# EAGLE board Pixelkit_v10LUT (EAGLE 5.08)
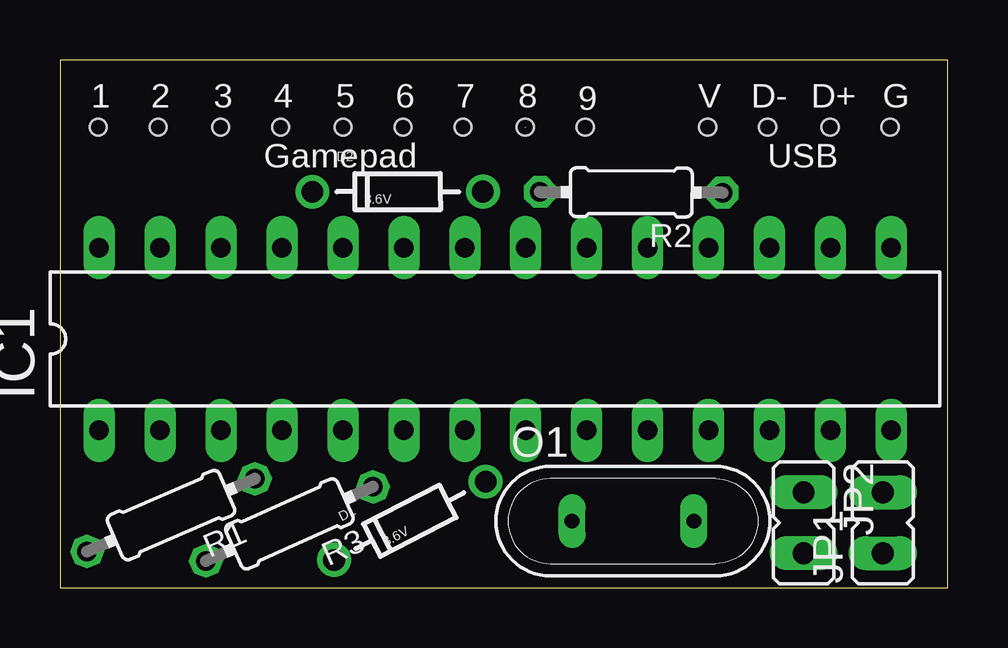
[diagram p0: board, top side]
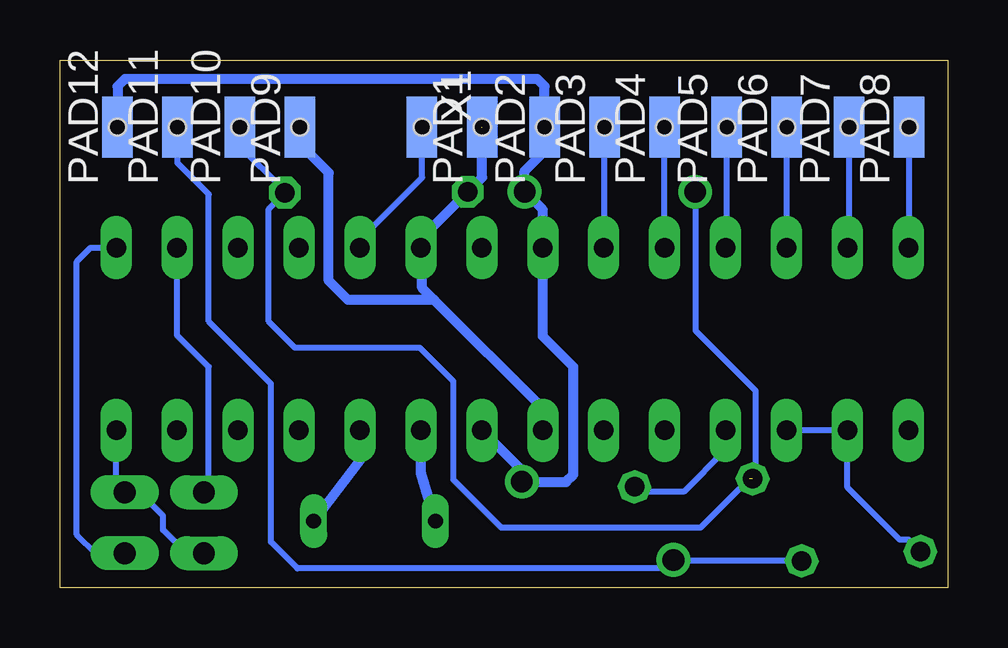
[diagram p1: board, bottom side, seen from below]

Size 37 x 22 mm. Coordinates in mm from the lower left corner, seen from the top.
Outline: 0,0 37,0 37,22 0,22 0,0
Copper layers (1*16): Top 0.035mm / dielectric 1.5mm / Bottom 0.035mm
Design rules "default": minimum track width 10mil, minimum drill 24mil, track to track 8mil, track to pad 8mil, pad to pad 8mil, via to via 8mil, smd to smd 8mil, copper to edge 40mil, drill to drill 8mil, minimum pad ring 10mil, minimum via ring 8mil, stop-mask expansion 4mil, vias tented up to drill 0mil, thermal gap 10mil
Net classes: 0 default: width 0.25 mm, clearance 0.125 mm; 1 power line: width 0.5 mm, clearance 0.25 mm
Holes 0.7 mm at 1.6,19.2 4.1,19.2 6.7,19.2 9.2,19.2 11.8,19.2 14.3,19.2 16.8,19.2 19.4,19.2 21.9,19.2 27,19.2 29.5,19.2 32.1,19.2 34.6,19.2

## Footprints (pad centres in the part's own frame; a part is rotated, then mirrored left to right if it is on the bottom)
DIODE-ZENER = drill 0.9 round: P$1 -3.556,0; P$2 3.556,0
DIL28-3 = drill 0.813 long: 1 -16.51,-3.81; 2 -13.97,-3.81; 3 -11.43,-3.81; 4 -8.89,-3.81; 5 -6.35,-3.81; 6 -3.81,-3.81; 7 -1.27,-3.81; 8 1.27,-3.81; 9 3.81,-3.81; 10 6.35,-3.81; 11 8.89,-3.81; 12 11.43,-3.81; 13 13.97,-3.81; 14 16.51,-3.81; 15 16.51,3.81; 16 13.97,3.81; 17 11.43,3.81; 18 8.89,3.81; 19 6.35,3.81; 20 3.81,3.81; 21 1.27,3.81; 22 -1.27,3.81; 23 -3.81,3.81; 24 -6.35,3.81; 25 -8.89,3.81; 26 -11.43,3.81; 27 -13.97,3.81; 28 -16.51,3.81
JP1 = drill 0.914 long: 1 0,-1.27; 2 0,1.27
QS = drill 0.61 long: 1 -2.54,0; 2 2.54,0
SMD1,27-2,54 = smd 1.27 x 2.54: 1 0,0
0204/7 = drill 0.813 octagon: 1 -3.81,0; 2 3.81,0

## Placement (x,y rotation side)
D1  3.6V  [DIODE-ZENER]  14.59,2.79 27.3 top
D2  3.6V  [DIODE-ZENER]  14.07,16.5 0.1 top
IC1  MEGA8-P  [DIL28-3]  18.14,10.37 0 top
JP1  [JP1]  34.3,2.7 0 top
JP2  [JP1]  31,2.7 180 top
O1  12 Mhz  [QS]  23.89,2.77 0 top
PAD1  [SMD1,27-2,54]  19.4,19.2 0 bottom
PAD2  [SMD1,27-2,54]  16.8,19.2 0 bottom
PAD3  [SMD1,27-2,54]  14.3,19.2 0 bottom
PAD4  [SMD1,27-2,54]  11.8,19.2 0 bottom
PAD5  [SMD1,27-2,54]  9.2,19.2 0 bottom
PAD6  [SMD1,27-2,54]  6.7,19.2 0 bottom
PAD7  [SMD1,27-2,54]  4.1,19.2 0 bottom
PAD8  [SMD1,27-2,54]  1.6,19.2 0 bottom
PAD9  [SMD1,27-2,54]  27,19.2 0 bottom
PAD10  [SMD1,27-2,54]  29.5,19.2 0 bottom
PAD11  [SMD1,27-2,54]  32.1,19.2 0 bottom
PAD12  [SMD1,27-2,54]  34.6,19.2 0 bottom
R1  68  [0204/7]  4.63,3.02 203.4 top
R2  1.5K  [0204/7]  23.82,16.48 179.8 top
R3  68  [0204/7]  9.56,2.65 203.9 top
X1  [SMD1,27-2,54]  21.92,19.2 180 bottom

## Library data of the parts
D1 D2 = SparkFun
IC1 = atmel
JP1 JP2 = jumper
O1 = special
PAD1-PAD12 X1 = wirepad
R1-R3 = resistor

## Nets
+5V [power line]: IC1.7 IC1.20 PAD1.1 PAD9.1 R2.2
CLOCK: IC1.28 PAD8.1
DATA: IC1.26 PAD6.1
GND [power line]: D1.P$2 D2.P$2 IC1.8 IC1.22 PAD2.1 PAD12.1
LATCH: IC1.27 PAD7.1
N$1: IC1.2 IC1.3 R1.2
N$2: D2.P$1 PAD10.1 R1.1 R2.1
N$3: IC1.4 R3.1
N$4: IC1.10 O1.2
N$5: D1.P$1 PAD11.1 R3.2
N$6: IC1.14 JP1.2 JP2.2
N$7: IC1.15 JP1.1
N$8: IC1.16 JP2.1
N$9: IC1.25 PAD5.1
N$10: IC1.24 PAD4.1
N$11: IC1.23 PAD3.1
N&12: IC1.9 O1.1
SCK: IC1.19 X1.1

## Tracks (layer width: path | path; a pad name or v marks a point on that pad's centre or on a via)
+5V  (1 unrouted)
  Bottom 0.406: IC1.7 16.88,7.47 21.4,12 | 21.4,12 21.9,12.5 21.9,14.12 IC1.20 21.95,15.04 21.9,15.1 21.4,15.1 R2.2 19.4,17.1 19.4,19.18 | 21.4,12 25,12 25.8,12.8 25.8,17.3 27.02,18.52 27,18.55 PAD9.1
CLOCK
  Bottom 0.254: IC1.28 1.6,14.18 PAD8.1
DATA
  Bottom 0.254: IC1.26 PAD6.1
GND
  Bottom 0.406: IC1.8 17.75,4.88 D1.P$2 17.73,4.4 15.9,4.4 15.6,4.7 15.6,9.2 16.88,10.47 IC1.22 16.88,15.76 D2.P$2 17.63,17.37 16.8,18.2 PAD2.1 16.8,20.9 17.1,21.2 34.3,21.2 34.6,20.9 PAD12.1
LATCH
  Bottom 0.254: IC1.27 4.1,14.18 PAD7.1
N$1
  Bottom 0.254: IC1.3 IC1.2 4.17,4.17 2,2 1.63,2 R1.2
N$2  (1 unrouted)
  Bottom 0.254: D2.P$1 10.5,16.48 10.5,10.7 8,8.2 8,5.1 8.27,4.83 8.27,4.53 10.3,2.5 18.6,2.5 20.6,4.5 20.6,8.6 22,10 27.2,10 28.3,11.1 28.3,15.79 R2.1 27.62,16.52 29.6,18.5 29.6,19.1 PAD10.1
N$3
  Bottom 0.254: IC1.4 9.26,5.75 11,4 12.85,4 R3.1
N$4
  Bottom 0.406: IC1.10 24.5,5.3 O1.2
N$5
  Bottom 0.254: R3.2 11.38,1.11 D1.P$1 11.45,1.15 11.8,0.8 27.1,0.8 28.2,1.9 28.2,8.5 30.8,11.1 30.8,16.4 32.1,17.7 PAD11.1
N$6
  Bottom 0.254: IC1.14 34.66,4.33 JP1.2 33.67,3.97 32.7,3 32.7,2.4 32,1.7 31.27,1.7 JP2.2
N$7
  Bottom 0.254: IC1.15 35.73,14.18 36.3,13.6 36.3,2.2 35.5,1.4 34.33,1.4 JP1.1
N$8
  Bottom 0.254: IC1.16 32.12,10.52 30.8,9.2 30.8,4.17 JP2.1
N$9
  Bottom 0.254: IC1.25 9.2,14.18 PAD5.1
N$10
  Bottom 0.254: IC1.24 PAD4.1
N$11
  Bottom 0.254: IC1.23 14.3,14.18 PAD3.1
N&12
  Bottom 0.406: IC1.9 21.95,4.78 O1.1
SCK
  Bottom 0.254: IC1.19 24.5,14.51 21.9,17.1 21.9,19.14
  Bottom 0.406: 21.9,19.14 21.9,19.18 X1.1

## Text on the board
tPlace: 1 | 2 | 3 | 4 | 5 | 6 | 7 | 8 | 9 | V | D- | D+ | G | Gamepad | USB